# Altium PCB PCB_CONTROL.PcbDoc (part 2 of 15)
Units mil, origin at the board's own origin, x right, y up, seen from the top; angles counter-clockwise.
Board outline 7360.03 x 4773.15 mil, 2 copper layers (Top Layer, Bottom Layer); 73 components, 135 nets, 396 pads, 106 vias.
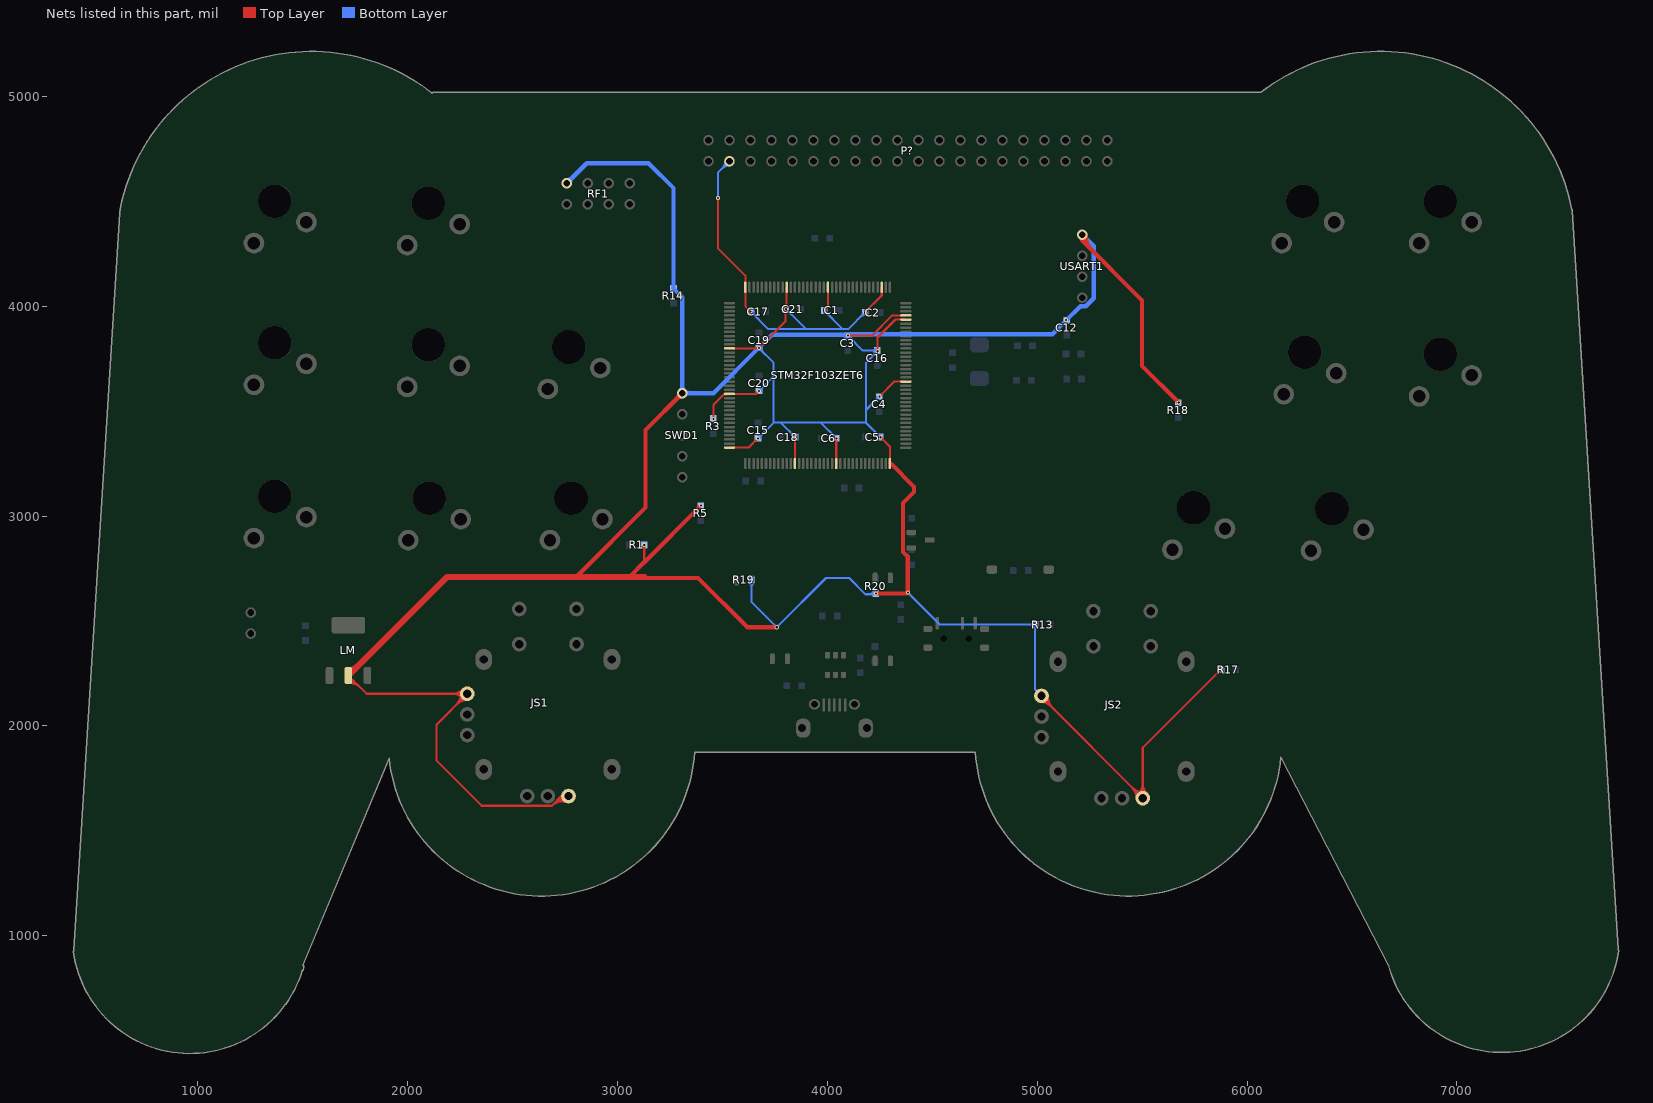
[diagram p2: the nets of this part, all layers, seen from the top]

## Via types
v1: diameter 20, hole 10, Top Layer to Bottom Layer, 104 vias
v2: diameter 30, hole 20, Top Layer to Bottom Layer, 2 vias

## Nets (pads, with @x,y where several pads share a name; then routed paths per layer and width w, separated by ;. In a path a pad name is that pad's centre, name@x,y a point inside that pad or via, vN(x,y) a via of type N, cw(c..) or ccw(c..) an arc to the next point about the centre after c; other vN are vias at no path point) (continued)
3V3: (continued)
  Bottom Layer w10: v1(3480,4515) 3480,4635 P?.3@3535,4690 ; v1(3635,3975) 3720,3890 3900,3890 ; R19.2@3639,2702 3639,2591 v1(3760,2470) 3995,2705 4105,2705 4182.54,2627.46 R20.2@4228.46,2627.46 ; v1(3670,3370) 3745,3445 ; v1(3675,3595) 3745,3665 ; C19.1@3675,3795 cw(c3675,3782.93) 3683.54,3791.46 cw(c3692.07,3800) C19.1@3680,3800 ; v1(3675,3800) 3745,3730 3745,3665 ; v1@3755,2470 ccw(c3742.93,2470) 3751.46,2478.54 ccw(c3760,2487.07) 3760,2475 ccw(c3760,2487.07) 3768.54,2478.54 ccw(c3777.07,2470) v1@3765,2470 ; v1(3805,3985) 3900,3890 ; v1(3985,3980) 4075,3890 ; C3.1@4106.03,3852.51 4170.54,3788 C16.1@4239,3788 ; v1(4240,3785) 4185,3730 4185,3505 ; v1@4385,2630 cw(c4385,2617.93) 4393.54,2626.46 cw(c4402.07,2635) v1@4390,2635 ; v1(4385,2635) 4537,2483 R13.2@4991,2483 4991,2173.57 JS2.1@5021.14,2143.43 ; R13.2@4983.22,2490.78 cw(c4964.44,2509.56) 4964.44,2483 cw(c4964.44,2456.44) 4983.22,2475.22 cw(c4964.44,2456.44) 4991,2456.44 cw(c5017.56,2456.44) R13.2@4998.78,2475.22 ; v1@3476.46,4518.54 ccw(c3467.93,4527.07) 3480,4527.07 ; v1@3476.46,4518.54 ccw(c3467.93,4527.07) 3480,4527.07 ; v1@3476.46,4518.54 ccw(c3467.93,4527.07) 3480,4527.07 ; v1@3476.46,4518.54 ccw(c3467.93,4527.07) 3480,4527.07 ; 3480,4527.07 ccw(c3492.07,4527.07) v1@3483.54,4518.54 ; 3480,4527.07 ccw(c3492.07,4527.07) v1@3483.54,4518.54 ; 3480,4527.07 ccw(c3492.07,4527.07) v1@3483.54,4518.54 ; 3480,4527.07 ccw(c3492.07,4527.07) v1@3483.54,4518.54 ; 3500.86,4655.86 cw(c3535,4621.72) P?.3@3535,4670 ; 3500.86,4655.86 ccw(c3466.72,4690) P?.3@3515,4690 ; 3500.86,4655.86 ccw(c3466.72,4690) P?.3@3515,4690 ; 3500.86,4655.86 cw(c3535,4621.72) P?.3@3535,4670 ; 3500.86,4655.86 ccw(c3466.72,4690) P?.3@3515,4690 ; 3500.86,4655.86 cw(c3535,4621.72) P?.3@3535,4670 ; 3500.86,4655.86 ccw(c3466.72,4690) P?.3@3515,4690 ; 3500.86,4655.86 cw(c3535,4621.72) P?.3@3535,4670 ; 3508.25,4664.8 cw(c3542.01,4655.76) P?.3@3535,4690 ; 3508.25,4664.8 cw(c3542.01,4655.76) P?.3@3535,4690 ; 3508.25,4664.8 cw(c3542.01,4655.76) P?.3@3535,4690 ; 3508.25,4664.8 cw(c3542.01,4655.76) P?.3@3535,4690 ; 3508.25,4664.8 cw(c3542.01,4655.76) P?.3@3535,4690 ; 3508.25,4664.8 cw(c3542.01,4655.76) P?.3@3535,4690 ; 3509.8,4663.25 ccw(c3500.76,4697.01) P?.3@3535,4690 ; 3509.8,4663.25 ccw(c3500.76,4697.01) P?.3@3535,4690 ; 3509.8,4663.25 ccw(c3500.76,4697.01) P?.3@3535,4690 ; 3509.8,4663.25 ccw(c3500.76,4697.01) P?.3@3535,4690 ; 3509.8,4663.25 ccw(c3500.76,4697.01) P?.3@3535,4690 ; 3509.8,4663.25 ccw(c3500.76,4697.01) P?.3@3535,4690 ; R19.2@3631.22,2689.22 cw(c3612.44,2670.44) 3639,2670.44 ; R19.2@3631.22,2689.22 cw(c3612.44,2670.44) 3639,2670.44 ; R19.2@3631.22,2689.22 cw(c3612.44,2670.44) 3639,2670.44 ; R19.2@3631.22,2689.22 cw(c3612.44,2670.44) 3639,2670.44 ; C17.1@3635,3970 cw(c3635,3957.93) C17.1@3643.54,3966.46 ; C17.1@3635,3970 cw(c3635,3957.93) C17.1@3643.54,3966.46 ; C17.1@3635,3970 cw(c3635,3957.93) C17.1@3643.54,3966.46 ; C17.1@3635,3970 cw(c3635,3957.93) C17.1@3643.54,3966.46 ; C17.1@3635,3970 cw(c3635,3957.93) C17.1@3643.54,3966.46 ; C17.1@3635,3970 cw(c3635,3957.93) C17.1@3643.54,3966.46 ; C17.1@3635,3970 cw(c3635,3957.93) C17.1@3643.54,3966.46 ; C17.1@3637,3963 cw(c3637,3938.86) 3654.07,3955.93 ; C17.1@3637,3963 cw(c3637,3938.86) 3654.07,3955.93 ; C17.1@3637,3963 cw(c3637,3938.86) 3654.07,3955.93 ; C17.1@3637,3963 cw(c3637,3938.86) 3654.07,3955.93 ; C17.1@3637,3963 cw(c3637,3938.86) 3654.07,3955.93 ; C17.1@3637,3963 cw(c3637,3938.86) 3654.07,3955.93 ; C17.1@3637,3963 cw(c3637,3938.86) 3654.07,3955.93 ; 3639,2670.44 cw(c3665.56,2670.44) R19.2@3646.78,2689.22 ; 3639,2670.44 cw(c3665.56,2670.44) R19.2@3646.78,2689.22 ; 3639,2670.44 cw(c3665.56,2670.44) R19.2@3646.78,2689.22 ; 3639,2670.44 cw(c3665.56,2670.44) R19.2@3646.78,2689.22 ; 3639,2675.44 ccw(c3612.44,2675.44) 3631.22,2694.22 cw(c3612.44,2675.44) 3639,2675.44 ; 3639,2675.44 cw(c3665.56,2675.44) 3646.78,2694.22 ccw(c3665.56,2675.44) 3639,2675.44 ; C17.1@3640,3975 ccw(c3652.07,3975) C17.1@3643.54,3966.46 ; C17.1@3640,3975 ccw(c3652.07,3975) C17.1@3643.54,3966.46 ; C17.1@3640,3975 ccw(c3652.07,3975) C17.1@3643.54,3966.46 ; C17.1@3640,3975 ccw(c3652.07,3975) C17.1@3643.54,3966.46 ; C17.1@3640,3975 ccw(c3652.07,3975) C17.1@3643.54,3966.46 ; C17.1@3640,3975 ccw(c3652.07,3975) C17.1@3643.54,3966.46 ; C17.1@3640,3975 ccw(c3652.07,3975) C17.1@3643.54,3966.46 ; C17.1@3648,3974 ccw(c3676.97,3974) 3656.49,3953.51 ; C17.1@3648,3974 ccw(c3676.97,3974) 3656.49,3953.51 ; C17.1@3648,3974 ccw(c3676.97,3974) 3656.49,3953.51 ; C17.1@3648,3974 ccw(c3676.97,3974) 3656.49,3953.51 ; C17.1@3648,3974 ccw(c3676.97,3974) 3656.49,3953.51 ; C17.1@3648,3974 ccw(c3676.97,3974) 3656.49,3953.51 ; C17.1@3648,3974 ccw(c3676.97,3974) 3656.49,3953.51 ; C15.1@3670,3375 ccw(c3670,3387.07) C15.1@3678.54,3378.54 ; C15.1@3670,3375 ccw(c3670,3387.07) C15.1@3678.54,3378.54 ; C15.1@3670,3375 ccw(c3670,3387.07) C15.1@3678.54,3378.54 ; C15.1@3670,3375 ccw(c3670,3387.07) C15.1@3678.54,3378.54 ; C19.1@3670.42,3798 ccw(c3683.36,3803.65) C19.1@3679.71,3790.01 ; C19.1@3670.42,3798 ccw(c3683.36,3803.65) C19.1@3679.71,3790.01 ; C19.1@3670.42,3798 ccw(c3683.36,3803.65) C19.1@3679.71,3790.01 ; C15.1@3671,3383 ccw(c3671,3411.97) 3691.49,3391.49 ; C15.1@3671,3383 ccw(c3671,3411.97) 3691.49,3391.49 ; C15.1@3671,3383 ccw(c3671,3411.97) 3691.49,3391.49 ; C15.1@3671,3383 ccw(c3671,3411.97) 3691.49,3391.49 ; C15.1@3675,3370 cw(c3687.07,3370) C15.1@3678.54,3378.54 ; C15.1@3675,3370 cw(c3687.07,3370) C15.1@3678.54,3378.54 ; C15.1@3675,3370 cw(c3687.07,3370) C15.1@3678.54,3378.54 ; C15.1@3675,3370 cw(c3687.07,3370) C15.1@3678.54,3378.54 ; C20.1@3675,3600 ccw(c3675,3612.07) C20.1@3683.54,3603.54 ; C20.1@3675,3600 ccw(c3675,3612.07) C20.1@3683.54,3603.54 ; C20.1@3675,3600 ccw(c3675,3612.07) C20.1@3683.54,3603.54 ; C20.1@3675,3600 ccw(c3675,3612.07) C20.1@3683.54,3603.54 ; C19.1@3675.71,3801.04 cw(c3668.98,3778.56) 3691.65,3784.63 ; C19.1@3675.71,3801.04 cw(c3668.98,3778.56) 3691.65,3784.63 ; C19.1@3675.71,3801.04 cw(c3668.98,3778.56) 3691.65,3784.63 ; C20.1@3676,3608 ccw(c3676,3636.97) 3696.49,3616.49 ; C20.1@3676,3608 ccw(c3676,3636.97) 3696.49,3616.49 ; C20.1@3676,3608 ccw(c3676,3636.97) 3696.49,3616.49 ; C20.1@3676,3608 ccw(c3676,3636.97) 3696.49,3616.49 ; C19.1@3676,3791 cw(c3676,3771.69) 3689.66,3785.34 ; C19.1@3676,3791 cw(c3676,3771.69) 3689.66,3785.34 ; C19.1@3676,3791 cw(c3676,3771.69) 3689.66,3785.34 ; C19.1@3677.13,3795.47 cw(c3680.88,3787.48) C19.1@3685.51,3795 ; C19.1@3677.13,3795.47 cw(c3680.88,3787.48) C19.1@3685.51,3795 ; C19.1@3677.13,3795.47 cw(c3680.88,3787.48) C19.1@3685.51,3795 ; C20.1@3680,3595 cw(c3692.07,3595) C20.1@3683.54,3603.54 ; C20.1@3680,3595 cw(c3692.07,3595) C20.1@3683.54,3603.54 ; C20.1@3680,3595 cw(c3692.07,3595) C20.1@3683.54,3603.54 ; C20.1@3680,3595 cw(c3692.07,3595) C20.1@3683.54,3603.54 ; C15.1@3682,3372 cw(c3706.14,3372) 3689.07,3389.07 ; C15.1@3682,3372 cw(c3706.14,3372) 3689.07,3389.07 ; C15.1@3682,3372 cw(c3706.14,3372) 3689.07,3389.07 ; C15.1@3682,3372 cw(c3706.14,3372) 3689.07,3389.07 ; C20.1@3687,3597 cw(c3711.14,3597) 3694.07,3614.07 ; C20.1@3687,3597 cw(c3711.14,3597) 3694.07,3614.07 ; C20.1@3687,3597 cw(c3711.14,3597) 3694.07,3614.07 ; C20.1@3687,3597 cw(c3711.14,3597) 3694.07,3614.07 ; C19.1@3687,3802 ccw(c3720.8,3802) 3696.9,3778.1 ; C19.1@3687,3802 ccw(c3720.8,3802) 3696.9,3778.1 ; C19.1@3687,3802 ccw(c3720.8,3802) 3696.9,3778.1 ; 3745,3445 3745,3665 ; 3745,3445 3780,3445 ; 3780,3445 3970,3445 ; 3780,3445 v1(3850,3375) ; C21.1@3802,3973 cw(c3802,3936.79) 3827.61,3962.39 ; C21.1@3802,3973 cw(c3802,3936.79) 3827.61,3962.39 ; C21.1@3802,3973 cw(c3802,3936.79) 3827.61,3962.39 ; C21.1@3802,3973 cw(c3802,3936.79) 3827.61,3962.39 ; C21.1@3802,3973 cw(c3802,3936.79) 3827.61,3962.39 ; C21.1@3802,3973 cw(c3802,3936.79) 3827.61,3962.39 ; C21.1@3802,3973 cw(c3802,3936.79) 3827.61,3962.39 ; C21.1@3802.95,3984.31 ccw(c3826.41,3992.02) 3820.02,3968.17 ; C21.1@3802.95,3984.31 ccw(c3826.41,3992.02) 3820.02,3968.17 ; C21.1@3802.95,3984.31 ccw(c3826.41,3992.02) 3820.02,3968.17 ; C21.1@3802.95,3984.31 ccw(c3826.41,3992.02) 3820.02,3968.17 ; C21.1@3802.95,3984.31 ccw(c3826.41,3992.02) 3820.02,3968.17 ; C21.1@3802.95,3984.31 ccw(c3826.41,3992.02) 3820.02,3968.17 ; C21.1@3802.95,3984.31 ccw(c3826.41,3992.02) 3820.02,3968.17 ; C21.1@3802.95,3984.31 ccw(c3826.41,3992.02) 3820.02,3968.17 ; C21.1@3802.95,3984.31 ccw(c3826.41,3992.02) 3820.02,3968.17 ; C21.1@3802.95,3984.31 ccw(c3826.41,3992.02) 3820.02,3968.17 ; C21.1@3802.95,3984.31 ccw(c3826.41,3992.02) 3820.02,3968.17 ; C21.1@3802.95,3984.31 ccw(c3826.41,3992.02) 3820.02,3968.17 ; C21.1@3802.95,3984.31 ccw(c3826.41,3992.02) 3820.02,3968.17 ; C21.1@3802.95,3984.31 ccw(c3826.41,3992.02) 3820.02,3968.17 ; C21.1@3802.95,3984.31 ccw(c3826.41,3992.02) 3820.02,3968.17 ; C21.1@3802.95,3984.31 ccw(c3826.41,3992.02) 3820.02,3968.17 ; C21.1@3802.95,3984.31 ccw(c3826.41,3992.02) 3820.02,3968.17 ; C21.1@3802.95,3984.31 ccw(c3826.41,3992.02) 3820.02,3968.17 ; C21.1@3802.95,3984.31 ccw(c3826.41,3992.02) 3820.02,3968.17 ; C21.1@3802.95,3984.31 ccw(c3826.41,3992.02) 3820.02,3968.17 ; C21.1@3802.95,3984.31 ccw(c3826.41,3992.02) 3820.02,3968.17 ; C21.1@3805,3980 cw(c3805,3967.93) C21.1@3813.54,3976.46 ; C21.1@3805,3980 cw(c3805,3967.93) C21.1@3813.54,3976.46 ; C21.1@3805,3980 cw(c3805,3967.93) C21.1@3813.54,3976.46 ; C21.1@3805,3980 cw(c3805,3967.93) C21.1@3813.54,3976.46 ; C21.1@3805,3980 cw(c3805,3967.93) C21.1@3813.54,3976.46 ; C21.1@3805,3980 cw(c3805,3967.93) C21.1@3813.54,3976.46 ; C21.1@3805,3980 cw(c3805,3967.93) C21.1@3813.54,3976.46 ; C21.1@3809.29,3982.43 ccw(c3815.79,3978.53) C21.1@3809.45,3974.38 ; C21.1@3809.29,3982.43 ccw(c3815.79,3978.53) C21.1@3809.45,3974.38 ; C21.1@3809.29,3982.43 ccw(c3815.79,3978.53) C21.1@3809.45,3974.38 ; C21.1@3809.29,3982.43 ccw(c3815.79,3978.53) C21.1@3809.45,3974.38 ; C21.1@3809.29,3982.43 ccw(c3815.79,3978.53) C21.1@3809.45,3974.38 ; C21.1@3809.29,3982.43 ccw(c3815.79,3978.53) C21.1@3809.45,3974.38 ; C21.1@3809.29,3982.43 ccw(c3815.79,3978.53) C21.1@3809.45,3974.38 ; C21.1@3809.29,3982.43 ccw(c3815.79,3978.53) C21.1@3809.45,3974.38 ; C21.1@3809.29,3982.43 ccw(c3815.79,3978.53) C21.1@3809.45,3974.38 ; C21.1@3809.29,3982.43 ccw(c3815.79,3978.53) C21.1@3809.45,3974.38 ; C21.1@3809.29,3982.43 ccw(c3815.79,3978.53) C21.1@3809.45,3974.38 ; C21.1@3809.29,3982.43 ccw(c3815.79,3978.53) C21.1@3809.45,3974.38 ; C21.1@3809.29,3982.43 ccw(c3815.79,3978.53) C21.1@3809.45,3974.38 ; C21.1@3809.29,3982.43 ccw(c3815.79,3978.53) C21.1@3809.45,3974.38 ; C21.1@3809.29,3982.43 ccw(c3815.79,3978.53) C21.1@3809.45,3974.38 ; C21.1@3809.29,3982.43 ccw(c3815.79,3978.53) C21.1@3809.45,3974.38 ; C21.1@3809.29,3982.43 ccw(c3815.79,3978.53) C21.1@3809.45,3974.38 ; C21.1@3809.29,3982.43 ccw(c3815.79,3978.53) C21.1@3809.45,3974.38 ; C21.1@3809.29,3982.43 ccw(c3815.79,3978.53) C21.1@3809.45,3974.38 ; C21.1@3809.29,3982.43 ccw(c3815.79,3978.53) C21.1@3809.45,3974.38 ; C21.1@3809.29,3982.43 ccw(c3815.79,3978.53) C21.1@3809.45,3974.38 ; C21.1@3809.29,3982.43 ccw(c3815.79,3978.53) C21.1@3809.45,3974.38 ; C21.1@3809.29,3982.43 ccw(c3815.79,3978.53) C21.1@3809.45,3974.38 ; C21.1@3809.29,3982.43 ccw(c3815.79,3978.53) C21.1@3809.45,3974.38 ; C21.1@3809.29,3982.43 ccw(c3815.79,3978.53) C21.1@3809.45,3974.38 ; C21.1@3809.29,3982.43 ccw(c3815.79,3978.53) C21.1@3809.45,3974.38 ; C21.1@3809.29,3982.43 ccw(c3815.79,3978.53) C21.1@3809.45,3974.38 ; C21.1@3809.29,3982.43 ccw(c3815.79,3978.53) C21.1@3809.45,3974.38 ; C21.1@3809.29,3982.43 ccw(c3815.79,3978.53) C21.1@3809.45,3974.38 ; C21.1@3809.29,3982.43 ccw(c3815.79,3978.53) C21.1@3809.45,3974.38 ; C21.1@3809.29,3982.43 ccw(c3815.79,3978.53) C21.1@3809.45,3974.38 ; C21.1@3809.29,3982.43 ccw(c3815.79,3978.53) C21.1@3809.45,3974.38 ; C21.1@3809.29,3982.43 ccw(c3815.79,3978.53) C21.1@3809.45,3974.38 ; C21.1@3809.29,3982.43 ccw(c3815.79,3978.53) C21.1@3809.45,3974.38 ; C21.1@3809.29,3982.43 ccw(c3815.79,3978.53) C21.1@3809.45,3974.38 ; C21.1@3809.29,3982.43 ccw(c3815.79,3978.53) C21.1@3809.45,3974.38 ; C21.1@3809.29,3982.43 ccw(c3815.79,3978.53) C21.1@3809.45,3974.38 ; C21.1@3809.29,3982.43 ccw(c3815.79,3978.53) C21.1@3809.45,3974.38 ; C21.1@3809.29,3982.43 ccw(c3815.79,3978.53) C21.1@3809.45,3974.38 ; C21.1@3809.29,3982.43 ccw(c3815.79,3978.53) C21.1@3809.45,3974.38 ; C21.1@3809.29,3982.43 ccw(c3815.79,3978.53) C21.1@3809.45,3974.38 ; C21.1@3809.29,3982.43 ccw(c3815.79,3978.53) C21.1@3809.45,3974.38 ; C21.1@3809.29,3982.43 ccw(c3815.79,3978.53) C21.1@3809.45,3974.38 ; C21.1@3809.29,3982.43 ccw(c3815.79,3978.53) C21.1@3809.45,3974.38 ; C21.1@3809.29,3982.43 ccw(c3815.79,3978.53) C21.1@3809.45,3974.38 ; C21.1@3809.29,3982.43 ccw(c3815.79,3978.53) C21.1@3809.45,3974.38 ; C21.1@3809.29,3982.43 ccw(c3815.79,3978.53) C21.1@3809.45,3974.38 ; C21.1@3809.29,3982.43 ccw(c3815.79,3978.53) C21.1@3809.45,3974.38 ; C21.1@3809.29,3982.43 ccw(c3815.79,3978.53) C21.1@3809.45,3974.38 ; C21.1@3809.29,3982.43 ccw(c3815.79,3978.53) C21.1@3809.45,3974.38 ; C21.1@3809.29,3982.43 ccw(c3815.79,3978.53) C21.1@3809.45,3974.38 ; C21.1@3809.29,3982.43 ccw(c3815.79,3978.53) C21.1@3809.45,3974.38 ; C21.1@3809.29,3982.43 ccw(c3815.79,3978.53) C21.1@3809.45,3974.38 ; C21.1@3809.29,3982.43 ccw(c3815.79,3978.53) C21.1@3809.45,3974.38 ; C21.1@3809.29,3982.43 ccw(c3815.79,3978.53) C21.1@3809.45,3974.38 ; C21.1@3809.29,3982.43 ccw(c3815.79,3978.53) C21.1@3809.45,3974.38 ; C21.1@3810,3985 ccw(c3822.07,3985) C21.1@3813.54,3976.46 ; C21.1@3810,3985 ccw(c3822.07,3985) C21.1@3813.54,3976.46 ; C21.1@3810,3985 ccw(c3822.07,3985) C21.1@3813.54,3976.46 ; C21.1@3810,3985 ccw(c3822.07,3985) C21.1@3813.54,3976.46 ; C21.1@3810,3985 ccw(c3822.07,3985) C21.1@3813.54,3976.46 ; C21.1@3810,3985 ccw(c3822.07,3985) C21.1@3813.54,3976.46 ; C21.1@3810,3985 ccw(c3822.07,3985) C21.1@3813.54,3976.46 ; C21.1@3813,3984 ccw(c3829.9,3984) C21.1@3817.95,3972.05 ; C21.1@3813,3984 ccw(c3829.9,3984) C21.1@3817.95,3972.05 ; C21.1@3813,3984 ccw(c3829.9,3984) C21.1@3817.95,3972.05 ; C21.1@3813,3984 ccw(c3829.9,3984) C21.1@3817.95,3972.05 ; C21.1@3813,3984 ccw(c3829.9,3984) C21.1@3817.95,3972.05 ; C21.1@3813,3984 ccw(c3829.9,3984) C21.1@3817.95,3972.05 ; C21.1@3813,3984 ccw(c3829.9,3984) C21.1@3817.95,3972.05 ; 3818.79,3406.21 v1(3850,3375) ; 3818.79,3406.21 v1(3850,3375) ; 3818.79,3406.21 v1(3850,3375) ; 3828.51,3396.49 cw(c3808.03,3376) C18.1@3837,3376 ; 3828.51,3396.49 cw(c3808.03,3376) C18.1@3837,3376 ; 3828.51,3396.49 cw(c3808.03,3376) C18.1@3837,3376 ; 3828.51,3396.49 cw(c3808.03,3376) C18.1@3837,3376 ; 3828.51,3396.49 cw(c3808.03,3376) C18.1@3837,3376 ; 3828.51,3396.49 cw(c3808.03,3376) C18.1@3837,3376 ; 3828.51,3396.49 cw(c3808.03,3376) C18.1@3837,3376 ; 3828.51,3396.49 cw(c3808.03,3376) C18.1@3837,3376 ; 3828.51,3396.49 cw(c3808.03,3376) C18.1@3837,3376 ; 3828.51,3396.49 cw(c3808.03,3376) C18.1@3837,3376 ; 3828.51,3396.49 cw(c3808.03,3376) C18.1@3837,3376 ; 3828.51,3396.49 cw(c3808.03,3376) C18.1@3837,3376 ; 3828.51,3396.49 cw(c3808.03,3376) C18.1@3837,3376 ; 3828.51,3396.49 cw(c3808.03,3376) C18.1@3837,3376 ; 3828.51,3396.49 cw(c3808.03,3376) C18.1@3837,3376 ; 3828.51,3396.49 cw(c3808.03,3376) C18.1@3837,3376 ; 3828.51,3396.49 cw(c3808.03,3376) C18.1@3837,3376 ; 3828.51,3396.49 cw(c3808.03,3376) C18.1@3837,3376 ; 3828.51,3396.49 cw(c3808.03,3376) C18.1@3837,3376 ; 3828.51,3396.49 cw(c3808.03,3376) C18.1@3837,3376 ; 3828.51,3396.49 cw(c3808.03,3376) C18.1@3837,3376 ; 3828.51,3396.49 cw(c3808.03,3376) C18.1@3837,3376 ; 3828.51,3396.49 cw(c3808.03,3376) C18.1@3837,3376 ; 3828.51,3396.49 cw(c3808.03,3376) C18.1@3837,3376 ; 3828.51,3396.49 cw(c3808.03,3376) C18.1@3837,3376 ; 3828.51,3396.49 cw(c3808.03,3376) C18.1@3837,3376 ; 3828.51,3396.49 cw(c3808.03,3376) C18.1@3837,3376 ; 3828.51,3396.49 cw(c3808.03,3376) C18.1@3837,3376 ; 3828.51,3396.49 cw(c3808.03,3376) C18.1@3837,3376 ; 3828.51,3396.49 cw(c3808.03,3376) C18.1@3837,3376 ; 3828.51,3396.49 cw(c3808.03,3376) C18.1@3837,3376 ; 3828.51,3396.49 cw(c3808.03,3376) C18.1@3837,3376 ; 3830.93,3394.07 ccw(c3848,3411.14) C18.1@3848,3387 ; 3830.93,3394.07 ccw(c3848,3411.14) C18.1@3848,3387 ; 3830.93,3394.07 ccw(c3848,3411.14) C18.1@3848,3387 ; 3830.93,3394.07 ccw(c3848,3411.14) C18.1@3848,3387 ; 3830.93,3394.07 ccw(c3848,3411.14) C18.1@3848,3387 ; 3830.93,3394.07 ccw(c3848,3411.14) C18.1@3848,3387 ; 3830.93,3394.07 ccw(c3848,3411.14) C18.1@3848,3387 ; 3830.93,3394.07 ccw(c3848,3411.14) C18.1@3848,3387 ; 3830.93,3394.07 ccw(c3848,3411.14) C18.1@3848,3387 ; 3830.93,3394.07 ccw(c3848,3411.14) C18.1@3848,3387 ; 3830.93,3394.07 ccw(c3848,3411.14) C18.1@3848,3387 ; 3830.93,3394.07 ccw(c3848,3411.14) C18.1@3848,3387 ; 3830.93,3394.07 ccw(c3848,3411.14) C18.1@3848,3387 ; 3830.93,3394.07 ccw(c3848,3411.14) C18.1@3848,3387 ; 3830.93,3394.07 ccw(c3848,3411.14) C18.1@3848,3387 ; 3830.93,3394.07 ccw(c3848,3411.14) C18.1@3848,3387 ; 3830.93,3394.07 ccw(c3848,3411.14) C18.1@3848,3387 ; 3830.93,3394.07 ccw(c3848,3411.14) C18.1@3848,3387 ; 3830.93,3394.07 ccw(c3848,3411.14) C18.1@3848,3387 ; 3830.93,3394.07 ccw(c3848,3411.14) C18.1@3848,3387 ; 3830.93,3394.07 ccw(c3848,3411.14) C18.1@3848,3387 ; 3830.93,3394.07 ccw(c3848,3411.14) C18.1@3848,3387 ; 3830.93,3394.07 ccw(c3848,3411.14) C18.1@3848,3387 ; 3830.93,3394.07 ccw(c3848,3411.14) C18.1@3848,3387 ; 3830.93,3394.07 ccw(c3848,3411.14) C18.1@3848,3387 ; 3830.93,3394.07 ccw(c3848,3411.14) C18.1@3848,3387 ; 3830.93,3394.07 ccw(c3848,3411.14) C18.1@3848,3387 ; 3830.93,3394.07 ccw(c3848,3411.14) C18.1@3848,3387 ; 3830.93,3394.07 ccw(c3848,3411.14) C18.1@3848,3387 ; 3830.93,3394.07 ccw(c3848,3411.14) C18.1@3848,3387 ; 3830.93,3394.07 ccw(c3848,3411.14) C18.1@3848,3387 ; 3830.93,3394.07 ccw(c3848,3411.14) C18.1@3848,3387 ; C18.1@3841.46,3383.54 cw(c3832.93,3375) C18.1@3845,3375 ; C18.1@3841.46,3383.54 ccw(c3850,3392.07) C18.1@3850,3380 ; C18.1@3841.46,3383.54 cw(c3832.93,3375) C18.1@3845,3375 ; C18.1@3841.46,3383.54 ccw(c3850,3392.07) C18.1@3850,3380 ; C18.1@3841.46,3383.54 cw(c3832.93,3375) C18.1@3845,3375 ; C18.1@3841.46,3383.54 ccw(c3850,3392.07) C18.1@3850,3380 ; C18.1@3841.46,3383.54 cw(c3832.93,3375) C18.1@3845,3375 ; C18.1@3841.46,3383.54 ccw(c3850,3392.07) C18.1@3850,3380 ; C18.1@3841.46,3383.54 ccw(c3850,3392.07) C18.1@3850,3380 ; C18.1@3841.46,3383.54 cw(c3832.93,3375) C18.1@3845,3375 ; C18.1@3841.46,3383.54 ccw(c3850,3392.07) C18.1@3850,3380 ; C18.1@3841.46,3383.54 cw(c3832.93,3375) C18.1@3845,3375 ; C18.1@3841.46,3383.54 ccw(c3850,3392.07) C18.1@3850,3380 ; C18.1@3841.46,3383.54 cw(c3832.93,3375) C18.1@3845,3375 ; C18.1@3841.46,3383.54 ccw(c3850,3392.07) C18.1@3850,3380 ; C18.1@3841.46,3383.54 cw(c3832.93,3375) C18.1@3845,3375 ; C18.1@3841.46,3383.54 ccw(c3850,3392.07) C18.1@3850,3380 ; C18.1@3841.46,3383.54 cw(c3832.93,3375) C18.1@3845,3375 ; C18.1@3841.46,3383.54 ccw(c3850,3392.07) C18.1@3850,3380 ; C18.1@3841.46,3383.54 cw(c3832.93,3375) C18.1@3845,3375 ; C18.1@3841.46,3383.54 ccw(c3850,3392.07) C18.1@3850,3380 ; C18.1@3841.46,3383.54 cw(c3832.93,3375) C18.1@3845,3375 ; C18.1@3841.46,3383.54 ccw(c3850,3392.07) C18.1@3850,3380 ; C18.1@3841.46,3383.54 cw(c3832.93,3375) C18.1@3845,3375 ; C18.1@3841.46,3383.54 ccw(c3850,3392.07) C18.1@3850,3380 ; C18.1@3841.46,3383.54 cw(c3832.93,3375) C18.1@3845,3375 ; C18.1@3841.46,3383.54 ccw(c3850,3392.07) C18.1@3850,3380 ; C18.1@3841.46,3383.54 cw(c3832.93,3375) C18.1@3845,3375 ; C18.1@3841.46,3383.54 ccw(c3850,3392.07) C18.1@3850,3380 ; C18.1@3841.46,3383.54 cw(c3832.93,3375) C18.1@3845,3375 ; C18.1@3841.46,3383.54 ccw(c3850,3392.07) C18.1@3850,3380 ; C18.1@3841.46,3383.54 cw(c3832.93,3375) C18.1@3845,3375 ; C18.1@3841.46,3383.54 ccw(c3850,3392.07) C18.1@3850,3380 ; C18.1@3841.46,3383.54 cw(c3832.93,3375) C18.1@3845,3375 ; C18.1@3841.46,3383.54 ccw(c3850,3392.07) C18.1@3850,3380 ; C18.1@3841.46,3383.54 cw(c3832.93,3375) C18.1@3845,3375 ; C18.1@3841.46,3383.54 ccw(c3850,3392.07) C18.1@3850,3380 ; C18.1@3841.46,3383.54 cw(c3832.93,3375) C18.1@3845,3375 ; C18.1@3841.46,3383.54 ccw(c3850,3392.07) C18.1@3850,3380 ; C18.1@3841.46,3383.54 cw(c3832.93,3375) C18.1@3845,3375 ; C18.1@3841.46,3383.54 ccw(c3850,3392.07) C18.1@3850,3380 ; C18.1@3841.46,3383.54 cw(c3832.93,3375) C18.1@3845,3375 ; C18.1@3841.46,3383.54 ccw(c3850,3392.07) C18.1@3850,3380 ; C18.1@3841.46,3383.54 cw(c3832.93,3375) C18.1@3845,3375 ; C18.1@3841.46,3383.54 ccw(c3850,3392.07) C18.1@3850,3380 ; C18.1@3841.46,3383.54 cw(c3832.93,3375) C18.1@3845,3375 ; C18.1@3841.46,3383.54 ccw(c3850,3392.07) C18.1@3850,3380 ; C18.1@3841.46,3383.54 cw(c3832.93,3375) C18.1@3845,3375 ; C18.1@3841.46,3383.54 ccw(c3850,3392.07) C18.1@3850,3380 ; C18.1@3841.46,3383.54 cw(c3832.93,3375) C18.1@3845,3375 ; C18.1@3841.46,3383.54 ccw(c3850,3392.07) C18.1@3850,3380 ; C18.1@3841.46,3383.54 cw(c3832.93,3375) C18.1@3845,3375 ; C18.1@3841.46,3383.54 ccw(c3850,3392.07) C18.1@3850,3380 ; C18.1@3841.46,3383.54 cw(c3832.93,3375) C18.1@3845,3375 ; C18.1@3841.46,3383.54 ccw(c3850,3392.07) C18.1@3850,3380 ; C18.1@3841.46,3383.54 cw(c3832.93,3375) C18.1@3845,3375 ; C18.1@3841.46,3383.54 ccw(c3850,3392.07) C18.1@3850,3380 ; C18.1@3841.46,3383.54 cw(c3832.93,3375) C18.1@3845,3375 ; C18.1@3841.46,3383.54 ccw(c3850,3392.07) C18.1@3850,3380 ; C18.1@3841.46,3383.54 cw(c3832.93,3375) C18.1@3845,3375 ; C18.1@3841.46,3383.54 ccw(c3850,3392.07) C18.1@3850,3380 ; C18.1@3841.46,3383.54 cw(c3832.93,3375) C18.1@3845,3375 ; C18.1@3841.46,3383.54 ccw(c3850,3392.07) C18.1@3850,3380 ; C18.1@3841.46,3383.54 cw(c3832.93,3375) C18.1@3845,3375 ; C18.1@3841.46,3383.54 ccw(c3850,3392.07) C18.1@3850,3380 ; C18.1@3841.46,3383.54 cw(c3832.93,3375) C18.1@3845,3375 ; C18.1@3841.46,3383.54 ccw(c3850,3392.07) C18.1@3850,3380 ; C18.1@3841.46,3383.54 cw(c3832.93,3375) C18.1@3845,3375 ; C18.1@3841.46,3383.54 ccw(c3850,3392.07) C18.1@3850,3380 ; C18.1@3841.46,3383.54 cw(c3832.93,3375) C18.1@3845,3375 ; C18.1@3841.46,3383.54 ccw(c3850,3392.07) C18.1@3850,3380 ; C18.1@3841.46,3383.54 cw(c3832.93,3375) C18.1@3845,3375 ; 3900,3890 4075,3890 ; 3970,3445 4185,3445 ; 3970,3445 v1(4045,3370) ; C1.1@3985,3975 cw(c3985,3962.93) C1.1@3993.54,3971.46 ; C1.1@3985,3975 cw(c3985,3962.93) C1.1@3993.54,3971.46 ; C1.1@3985,3975 cw(c3985,3962.93) C1.1@3993.54,3971.46 ; C1.1@3985,3975 cw(c3985,3962.93) C1.1@3993.54,3971.46 ; C1.1@3985,3975 cw(c3985,3962.93) C1.1@3993.54,3971.46 ; C1.1@3985,3975 cw(c3985,3962.93) C1.1@3993.54,3971.46 ; C1.1@3985,3975 cw(c3985,3962.93) C1.1@3993.54,3971.46 ; C1.1@3987,3968 cw(c3987,3943.86) 4004.07,3960.93 ; C1.1@3987,3968 cw(c3987,3943.86) 4004.07,3960.93 ; C1.1@3987,3968 cw(c3987,3943.86) 4004.07,3960.93 ; C1.1@3987,3968 cw(c3987,3943.86) 4004.07,3960.93 ; C1.1@3987,3968 cw(c3987,3943.86) 4004.07,3960.93 ; C1.1@3987,3968 cw(c3987,3943.86) 4004.07,3960.93 ; C1.1@3987,3968 cw(c3987,3943.86) 4004.07,3960.93 ; C1.1@3990,3980 ccw(c4002.07,3980) C1.1@3993.54,3971.46 ; C1.1@3990,3980 ccw(c4002.07,3980) C1.1@3993.54,3971.46 ; C1.1@3990,3980 ccw(c4002.07,3980) C1.1@3993.54,3971.46 ; C1.1@3990,3980 ccw(c4002.07,3980) C1.1@3993.54,3971.46 ; C1.1@3990,3980 ccw(c4002.07,3980) C1.1@3993.54,3971.46 ; C1.1@3990,3980 ccw(c4002.07,3980) C1.1@3993.54,3971.46 ; C1.1@3990,3980 ccw(c4002.07,3980) C1.1@3993.54,3971.46 ; C1.1@3998,3979 ccw(c4026.97,3979) 4006.49,3958.51 ; C1.1@3998,3979 ccw(c4026.97,3979) 4006.49,3958.51 ; C1.1@3998,3979 ccw(c4026.97,3979) 4006.49,3958.51 ; C1.1@3998,3979 ccw(c4026.97,3979) 4006.49,3958.51 ; C1.1@3998,3979 ccw(c4026.97,3979) 4006.49,3958.51 ; C1.1@3998,3979 ccw(c4026.97,3979) 4006.49,3958.51 ; C1.1@3998,3979 ccw(c4026.97,3979) 4006.49,3958.51 ; 4013.79,3401.21 v1(4045,3370) ; 4013.79,3401.21 v1(4045,3370) ; 4013.79,3401.21 v1(4045,3370) ; 4023.51,3391.49 cw(c4003.03,3371) C6.1@4032,3371 ; 4023.51,3391.49 cw(c4003.03,3371) C6.1@4032,3371 ; 4023.51,3391.49 cw(c4003.03,3371) C6.1@4032,3371 ; 4023.51,3391.49 cw(c4003.03,3371) C6.1@4032,3371 ; 4023.51,3391.49 cw(c4003.03,3371) C6.1@4032,3371 ; 4023.51,3391.49 cw(c4003.03,3371) C6.1@4032,3371 ; 4023.51,3391.49 cw(c4003.03,3371) C6.1@4032,3371 ; 4023.51,3391.49 cw(c4003.03,3371) C6.1@4032,3371 ; 4023.51,3391.49 cw(c4003.03,3371) C6.1@4032,3371 ; 4023.51,3391.49 cw(c4003.03,3371) C6.1@4032,3371 ; 4023.51,3391.49 cw(c4003.03,3371) C6.1@4032,3371 ; 4023.51,3391.49 cw(c4003.03,3371) C6.1@4032,3371 ; 4023.51,3391.49 cw(c4003.03,3371) C6.1@4032,3371 ; 4023.51,3391.49 cw(c4003.03,3371) C6.1@4032,3371 ; 4023.51,3391.49 cw(c4003.03,3371) C6.1@4032,3371 ; 4023.51,3391.49 cw(c4003.03,3371) C6.1@4032,3371 ; 4023.51,3391.49 cw(c4003.03,3371) C6.1@4032,3371 ; 4023.51,3391.49 cw(c4003.03,3371) C6.1@4032,3371 ; 4023.51,3391.49 cw(c4003.03,3371) C6.1@4032,3371 ; 4023.51,3391.49 cw(c4003.03,3371) C6.1@4032,3371 ; 4023.51,3391.49 cw(c4003.03,3371) C6.1@4032,3371 ; 4023.51,3391.49 cw(c4003.03,3371) C6.1@4032,3371 ; 4023.51,3391.49 cw(c4003.03,3371) C6.1@4032,3371 ; 4023.51,3391.49 cw(c4003.03,3371) C6.1@4032,3371 ; 4023.51,3391.49 cw(c4003.03,3371) C6.1@4032,3371 ; 4023.51,3391.49 cw(c4003.03,3371) C6.1@4032,3371 ; 4023.51,3391.49 cw(c4003.03,3371) C6.1@4032,3371 ; 4023.51,3391.49 cw(c4003.03,3371) C6.1@4032,3371 ; 4023.51,3391.49 cw(c4003.03,3371) C6.1@4032,3371 ; 4023.51,3391.49 cw(c4003.03,3371) C6.1@4032,3371 ; 4023.51,3391.49 cw(c4003.03,3371) C6.1@4032,3371 ; 4023.51,3391.49 cw(c4003.03,3371) C6.1@4032,3371 ; 4025.93,3389.07 ccw(c4043,3406.14) C6.1@4043,3382 ; 4025.93,3389.07 ccw(c4043,3406.14) C6.1@4043,3382 ; 4025.93,3389.07 ccw(c4043,3406.14) C6.1@4043,3382 ; 4025.93,3389.07 ccw(c4043,3406.14) C6.1@4043,3382 ; 4025.93,3389.07 ccw(c4043,3406.14) C6.1@4043,3382 ; 4025.93,3389.07 ccw(c4043,3406.14) C6.1@4043,3382 ; 4025.93,3389.07 ccw(c4043,3406.14) C6.1@4043,3382 ; 4025.93,3389.07 ccw(c4043,3406.14) C6.1@4043,3382 ; 4025.93,3389.07 ccw(c4043,3406.14) C6.1@4043,3382 ; 4025.93,3389.07 ccw(c4043,3406.14) C6.1@4043,3382 ; 4025.93,3389.07 ccw(c4043,3406.14) C6.1@4043,3382 ; 4025.93,3389.07 ccw(c4043,3406.14) C6.1@4043,3382 ; 4025.93,3389.07 ccw(c4043,3406.14) C6.1@4043,3382 ; 4025.93,3389.07 ccw(c4043,3406.14) C6.1@4043,3382 ; 4025.93,3389.07 ccw(c4043,3406.14) C6.1@4043,3382 ; 4025.93,3389.07 ccw(c4043,3406.14) C6.1@4043,3382 ; 4025.93,3389.07 ccw(c4043,3406.14) C6.1@4043,3382 ; 4025.93,3389.07 ccw(c4043,3406.14) C6.1@4043,3382 ; 4025.93,3389.07 ccw(c4043,3406.14) C6.1@4043,3382 ; 4025.93,3389.07 ccw(c4043,3406.14) C6.1@4043,3382 ; 4025.93,3389.07 ccw(c4043,3406.14) C6.1@4043,3382 ; 4025.93,3389.07 ccw(c4043,3406.14) C6.1@4043,3382 ; 4025.93,3389.07 ccw(c4043,3406.14) C6.1@4043,3382 ; 4025.93,3389.07 ccw(c4043,3406.14) C6.1@4043,3382 ; 4025.93,3389.07 ccw(c4043,3406.14) C6.1@4043,3382 ; 4025.93,3389.07 ccw(c4043,3406.14) C6.1@4043,3382 ; 4025.93,3389.07 ccw(c4043,3406.14) C6.1@4043,3382 ; 4025.93,3389.07 ccw(c4043,3406.14) C6.1@4043,3382 ; 4025.93,3389.07 ccw(c4043,3406.14) C6.1@4043,3382 ; 4025.93,3389.07 ccw(c4043,3406.14) C6.1@4043,3382 ; 4025.93,3389.07 ccw(c4043,3406.14) C6.1@4043,3382 ; 4025.93,3389.07 ccw(c4043,3406.14) C6.1@4043,3382 ; C6.1@4036.46,3378.54 cw(c4027.93,3370) C6.1@4040,3370 ; C6.1@4036.46,3378.54 ccw(c4045,3387.07) C6.1@4045,3375 ; C6.1@4036.46,3378.54 cw(c4027.93,3370) C6.1@4040,3370 ; C6.1@4036.46,3378.54 ccw(c4045,3387.07) C6.1@4045,3375 ; C6.1@4036.46,3378.54 cw(c4027.93,3370) C6.1@4040,3370 ; C6.1@4036.46,3378.54 ccw(c4045,3387.07) C6.1@4045,3375 ; C6.1@4036.46,3378.54 cw(c4027.93,3370) C6.1@4040,3370 ; C6.1@4036.46,3378.54 ccw(c4045,3387.07) C6.1@4045,3375 ; C6.1@4036.46,3378.54 ccw(c4045,3387.07) C6.1@4045,3375 ; C6.1@4036.46,3378.54 cw(c4027.93,3370) C6.1@4040,3370 ; C6.1@4036.46,3378.54 ccw(c4045,3387.07) C6.1@4045,3375 ; C6.1@4036.46,3378.54 cw(c4027.93,3370) C6.1@4040,3370 ; C6.1@4036.46,3378.54 ccw(c4045,3387.07) C6.1@4045,3375 ; C6.1@4036.46,3378.54 cw(c4027.93,3370) C6.1@4040,3370 ; C6.1@4036.46,3378.54 ccw(c4045,3387.07) C6.1@4045,3375 ; C6.1@4036.46,3378.54 cw(c4027.93,3370) C6.1@4040,3370 ; C6.1@4036.46,3378.54 ccw(c4045,3387.07) C6.1@4045,3375 ; C6.1@4036.46,3378.54 cw(c4027.93,3370) C6.1@4040,3370 ; C6.1@4036.46,3378.54 ccw(c4045,3387.07) C6.1@4045,3375 ; C6.1@4036.46,3378.54 cw(c4027.93,3370) C6.1@4040,3370 ; C6.1@4036.46,3378.54 ccw(c4045,3387.07) C6.1@4045,3375 ; C6.1@4036.46,3378.54 cw(c4027.93,3370) C6.1@4040,3370 ; C6.1@4036.46,3378.54 ccw(c4045,3387.07) C6.1@4045,3375 ; C6.1@4036.46,3378.54 cw(c4027.93,3370) C6.1@4040,3370 ; C6.1@4036.46,3378.54 ccw(c4045,3387.07) C6.1@4045,3375 ; C6.1@4036.46,3378.54 cw(c4027.93,3370) C6.1@4040,3370 ; C6.1@4036.46,3378.54 ccw(c4045,3387.07) C6.1@4045,3375 ; C6.1@4036.46,3378.54 cw(c4027.93,3370) C6.1@4040,3370 ; C6.1@4036.46,3378.54 ccw(c4045,3387.07) C6.1@4045,3375 ; C6.1@4036.46,3378.54 cw(c4027.93,3370) C6.1@4040,3370 ; C6.1@4036.46,3378.54 ccw(c4045,3387.07) C6.1@4045,3375 ; C6.1@4036.46,3378.54 cw(c4027.93,3370) C6.1@4040,3370 ; C6.1@4036.46,3378.54 ccw(c4045,3387.07) C6.1@4045,3375 ; C6.1@4036.46,3378.54 cw(c4027.93,3370) C6.1@4040,3370 ; C6.1@4036.46,3378.54 ccw(c4045,3387.07) C6.1@4045,3375 ; C6.1@4036.46,3378.54 cw(c4027.93,3370) C6.1@4040,3370 ; C6.1@4036.46,3378.54 ccw(c4045,3387.07) C6.1@4045,3375 ; C6.1@4036.46,3378.54 cw(c4027.93,3370) C6.1@4040,3370 ; C6.1@4036.46,3378.54 ccw(c4045,3387.07) C6.1@4045,3375 ; C6.1@4036.46,3378.54 cw(c4027.93,3370) C6.1@4040,3370 ; C6.1@4036.46,3378.54 ccw(c4045,3387.07) C6.1@4045,3375 ; C6.1@4036.46,3378.54 cw(c4027.93,3370) C6.1@4040,3370 ; C6.1@4036.46,3378.54 ccw(c4045,3387.07) C6.1@4045,3375 ; C6.1@4036.46,3378.54 cw(c4027.93,3370) C6.1@4040,3370 ; C6.1@4036.46,3378.54 ccw(c4045,3387.07) C6.1@4045,3375 ; C6.1@4036.46,3378.54 cw(c4027.93,3370) C6.1@4040,3370 ; C6.1@4036.46,3378.54 ccw(c4045,3387.07) C6.1@4045,3375 ; C6.1@4036.46,3378.54 cw(c4027.93,3370) C6.1@4040,3370 ; C6.1@4036.46,3378.54 ccw(c4045,3387.07) C6.1@4045,3375 ; C6.1@4036.46,3378.54 cw(c4027.93,3370) C6.1@4040,3370 ; C6.1@4036.46,3378.54 ccw(c4045,3387.07) C6.1@4045,3375 ; C6.1@4036.46,3378.54 cw(c4027.93,3370) C6.1@4040,3370 ; C6.1@4036.46,3378.54 ccw(c4045,3387.07) C6.1@4045,3375 ; C6.1@4036.46,3378.54 cw(c4027.93,3370) C6.1@4040,3370 ; C6.1@4036.46,3378.54 ccw(c4045,3387.07) C6.1@4045,3375 ; C6.1@4036.46,3378.54 cw(c4027.93,3370) C6.1@4040,3370 ; C6.1@4036.46,3378.54 ccw(c4045,3387.07) C6.1@4045,3375 ; C6.1@4036.46,3378.54 cw(c4027.93,3370) C6.1@4040,3370 ; C6.1@4036.46,3378.54 ccw(c4045,3387.07) C6.1@4045,3375 ; C6.1@4036.46,3378.54 cw(c4027.93,3370) C6.1@4040,3370 ; C6.1@4036.46,3378.54 ccw(c4045,3387.07) C6.1@4045,3375 ; C6.1@4036.46,3378.54 cw(c4027.93,3370) C6.1@4040,3370 ; C6.1@4036.46,3378.54 ccw(c4045,3387.07) C6.1@4045,3375 ; C6.1@4036.46,3378.54 cw(c4027.93,3370) C6.1@4040,3370 ; C6.1@4036.46,3378.54 ccw(c4045,3387.07) C6.1@4045,3375 ; C6.1@4036.46,3378.54 cw(c4027.93,3370) C6.1@4040,3370 ; C6.1@4036.46,3378.54 ccw(c4045,3387.07) C6.1@4045,3375 ; C6.1@4036.46,3378.54 cw(c4027.93,3370) C6.1@4040,3370 ; C6.1@4036.46,3378.54 ccw(c4045,3387.07) C6.1@4045,3375 ; C6.1@4036.46,3378.54 cw(c4027.93,3370) C6.1@4040,3370 ; C6.1@4036.46,3378.54 ccw(c4045,3387.07) C6.1@4045,3375 ; C6.1@4036.46,3378.54 cw(c4027.93,3370) C6.1@4040,3370 ; 4075,3890 4100,3890 v1(4180,3970) ; C3.1@4099,3847 cw(c4099,3816.73) 4120.4,3838.13 ; C3.1@4099,3847 cw(c4099,3813.2) 4122.9,3837.1 ; C3.1@4099,3847 cw(c4099,3813.2) 4122.9,3837.1 ; C3.1@4099,3847 cw(c4099,3813.2) 4122.9,3837.1 ; C3.1@4099,3847 cw(c4099,3816.73) 4120.4,3838.13 ; C3.1@4099,3847 cw(c4099,3816.73) 4120.4,3838.13 ; C3.1@4099,3847 cw(c4099,3816.73) 4120.4,3838.13 ; C3.1@4099.96,3858.29 ccw(c4122.44,3865.02) 4116.37,3842.35 ; C3.1@4099.96,3858.29 ccw(c4122.44,3865.02) 4116.37,3842.35 ; C3.1@4099.96,3858.29 ccw(c4122.44,3865.02) 4116.37,3842.35 ; C3.1@4099.96,3858.29 ccw(c4122.44,3865.02) 4116.37,3842.35 ; C3.1@4099.96,3858.29 ccw(c4122.44,3865.02) 4116.37,3842.35 ; C3.1@4099.96,3858.29 ccw(c4122.44,3865.02) 4116.37,3842.35 ; C3.1@4099.96,3858.29 ccw(c4122.44,3865.02) 4116.37,3842.35 ; C3.1@4099.96,3858.29 ccw(c4122.44,3865.02) 4116.37,3842.35 ; C3.1@4099.96,3858.29 ccw(c4122.44,3865.02) 4116.37,3842.35 ; C3.1@4099.96,3858.29 ccw(c4122.44,3865.02) 4116.37,3842.35 ; C3.1@4099.96,3858.29 ccw(c4122.44,3865.02) 4116.37,3842.35 ; C3.1@4099.96,3858.29 ccw(c4122.44,3865.02) 4116.37,3842.35 ; C3.1@4099.96,3858.29 ccw(c4122.44,3865.02) 4116.37,3842.35 ; C3.1@4099.96,3858.29 ccw(c4122.44,3865.02) 4116.37,3842.35 ; C3.1@4099.96,3858.29 ccw(c4122.44,3865.02) 4116.37,3842.35 ; C3.1@4100,3855 cw(c4100,3842.93) C3.1@4108.54,3851.46 ; C3.1@4100,3855 cw(c4100,3842.93) C3.1@4108.54,3851.46 ; C3.1@4100,3855 cw(c4100,3842.93) C3.1@4108.54,3851.46 ; C3.1@4102.12,3864.53 cw(c4095.09,3849.48) C3.1@4111.13,3853.78 ; C3.1@4102.12,3864.53 cw(c4095.09,3849.48) C3.1@4111.13,3853.78 ; C3.1@4102.12,3864.53 cw(c4095.09,3849.48) C3.1@4111.13,3853.78 ; C3.1@4102.12,3864.53 cw(c4095.09,3849.48) C3.1@4111.13,3853.78 ; C3.1@4102.12,3864.53 cw(c4095.09,3849.48) C3.1@4111.13,3853.78 ; C3.1@4102.12,3864.53 cw(c4095.09,3849.48) C3.1@4111.13,3853.78 ; C3.1@4102.12,3864.53 cw(c4095.09,3849.48) C3.1@4111.13,3853.78 ; C3.1@4102.12,3864.53 cw(c4095.09,3849.48) C3.1@4111.13,3853.78 ; C3.1@4102.12,3864.53 cw(c4095.09,3849.48) C3.1@4111.13,3853.78 ; C3.1@4102.12,3864.53 cw(c4095.09,3849.48) C3.1@4111.13,3853.78 ; C3.1@4102.12,3864.53 cw(c4095.09,3849.48) C3.1@4111.13,3853.78 ; C3.1@4102.12,3864.53 cw(c4095.09,3849.48) C3.1@4111.13,3853.78 ; C3.1@4102.12,3864.53 cw(c4095.09,3849.48) C3.1@4111.13,3853.78 ; C3.1@4102.12,3864.53 cw(c4095.09,3849.48) C3.1@4111.13,3853.78 ; C3.1@4102.12,3864.53 cw(c4095.09,3849.48) C3.1@4111.13,3853.78 ; C3.1@4102.12,3864.53 cw(c4095.09,3849.48) C3.1@4111.13,3853.78 ; C3.1@4102.12,3864.53 cw(c4095.09,3849.48) C3.1@4111.13,3853.78 ; C3.1@4102.12,3864.53 cw(c4095.09,3849.48) C3.1@4111.13,3853.78 ; C3.1@4102.31,3864.43 cw(c4094.08,3848.66) C3.1@4111.27,3853.26 ; C3.1@4102.31,3864.43 cw(c4094.08,3848.66) C3.1@4111.27,3853.26 ; C3.1@4102.31,3864.43 cw(c4094.08,3848.66) C3.1@4111.27,3853.26 ; C3.1@4102.31,3864.43 cw(c4094.08,3848.66) C3.1@4111.27,3853.26 ; C3.1@4102.31,3864.43 cw(c4094.08,3848.66) C3.1@4111.27,3853.26 ; C3.1@4102.31,3864.43 cw(c4094.08,3848.66) C3.1@4111.27,3853.26 ; C3.1@4102.31,3864.43 cw(c4094.08,3848.66) C3.1@4111.27,3853.26 ; C3.1@4102.31,3864.43 cw(c4094.08,3848.66) C3.1@4111.27,3853.26 ; C3.1@4102.31,3864.43 cw(c4094.08,3848.66) C3.1@4111.27,3853.26 ; C3.1@4102.31,3864.43 cw(c4094.08,3848.66) C3.1@4111.27,3853.26 ; C3.1@4104.78,3858.54 ccw(c4116.69,3854.89) C3.1@4106.09,3848.35 ; C3.1@4104.78,3858.54 ccw(c4116.69,3854.89) C3.1@4106.09,3848.35 ; C3.1@4104.78,3858.54 ccw(c4116.69,3854.89) C3.1@4106.09,3848.35 ; C3.1@4104.78,3858.54 ccw(c4116.69,3854.89) C3.1@4106.09,3848.35 ; C3.1@4104.78,3858.54 ccw(c4116.69,3854.89) C3.1@4106.09,3848.35 ; C3.1@4104.78,3858.54 ccw(c4116.69,3854.89) C3.1@4106.09,3848.35 ; C3.1@4104.78,3858.54 ccw(c4116.69,3854.89) C3.1@4106.09,3848.35 ; C3.1@4104.78,3858.54 ccw(c4116.69,3854.89) C3.1@4106.09,3848.35 ; C3.1@4104.78,3858.54 ccw(c4116.69,3854.89) C3.1@4106.09,3848.35 ; C3.1@4104.78,3858.54 ccw(c4116.69,3854.89) C3.1@4106.09,3848.35 ; C3.1@4104.78,3858.54 ccw(c4116.69,3854.89) C3.1@4106.09,3848.35 ; C3.1@4104.78,3858.54 ccw(c4116.69,3854.89) C3.1@4106.09,3848.35 ; C3.1@4104.78,3858.54 ccw(c4116.69,3854.89) C3.1@4106.09,3848.35 ; C3.1@4104.78,3858.54 ccw(c4116.69,3854.89) C3.1@4106.09,3848.35 ; C3.1@4104.78,3858.54 ccw(c4116.69,3854.89) C3.1@4106.09,3848.35 ; C3.1@4104.78,3858.54 ccw(c4116.69,3854.89) C3.1@4106.09,3848.35 ; C3.1@4104.78,3858.54 ccw(c4116.69,3854.89) C3.1@4106.09,3848.35 ; C3.1@4104.78,3858.54 ccw(c4116.69,3854.89) C3.1@4106.09,3848.35 ; C3.1@4104.78,3858.54 ccw(c4116.69,3854.89) C3.1@4106.09,3848.35 ; C3.1@4104.78,3858.54 ccw(c4116.69,3854.89) C3.1@4106.09,3848.35 ; C3.1@4104.78,3858.54 ccw(c4116.69,3854.89) C3.1@4106.09,3848.35 ; C3.1@4104.78,3858.54 ccw(c4116.69,3854.89) C3.1@4106.09,3848.35 ; C3.1@4104.78,3858.54 ccw(c4116.69,3854.89) C3.1@4106.09,3848.35 ; C3.1@4104.78,3858.54 ccw(c4116.69,3854.89) C3.1@4106.09,3848.35 ; C3.1@4104.78,3858.54 ccw(c4116.69,3854.89) C3.1@4106.09,3848.35 ; C3.1@4104.78,3858.54 ccw(c4116.69,3854.89) C3.1@4106.09,3848.35 ; C3.1@4104.78,3858.54 ccw(c4116.69,3854.89) C3.1@4106.09,3848.35 ; C3.1@4104.78,3858.54 ccw(c4116.69,3854.89) C3.1@4106.09,3848.35 ; C3.1@4104.78,3858.54 ccw(c4116.69,3854.89) C3.1@4106.09,3848.35 ; C3.1@4104.78,3858.54 ccw(c4116.69,3854.89) C3.1@4106.09,3848.35 ; C3.1@4104.78,3858.54 ccw(c4116.69,3854.89) C3.1@4106.09,3848.35 ; C3.1@4104.78,3858.54 ccw(c4116.69,3854.89) C3.1@4106.09,3848.35 ; C3.1@4104.78,3858.54 ccw(c4116.69,3854.89) C3.1@4106.09,3848.35 ; C3.1@4104.78,3858.54 ccw(c4116.69,3854.89) C3.1@4106.09,3848.35 ; C3.1@4104.78,3858.54 ccw(c4116.69,3854.89) C3.1@4106.09,3848.35 ; C3.1@4104.78,3858.54 ccw(c4116.69,3854.89) C3.1@4106.09,3848.35 ; C3.1@4104.78,3858.54 ccw(c4116.69,3854.89) C3.1@4106.09,3848.35 ; C3.1@4104.78,3858.54 ccw(c4116.69,3854.89) C3.1@4106.09,3848.35 ; C3.1@4104.78,3858.54 ccw(c4116.69,3854.89) C3.1@4106.09,3848.35 ; C3.1@4104.78,3858.54 ccw(c4116.69,3854.89) C3.1@4106.09,3848.35 ; C3.1@4104.78,3858.54 ccw(c4116.69,3854.89) C3.1@4106.09,3848.35 ; C3.1@4104.78,3858.54 ccw(c4116.69,3854.89) C3.1@4106.09,3848.35 ; C3.1@4104.78,3858.54 ccw(c4116.69,3854.89) C3.1@4106.09,3848.35 ; C3.1@4104.78,3858.54 ccw(c4116.69,3854.89) C3.1@4106.09,3848.35 ; C3.1@4104.78,3858.54 ccw(c4116.69,3854.89) C3.1@4106.09,3848.35 ; C3.1@4104.78,3858.54 ccw(c4116.69,3854.89) C3.1@4106.09,3848.35 ; C3.1@4105,3860 ccw(c4120.6,3860) C3.1@4109.57,3848.97 ; C3.1@4105,3860 ccw(c4117.07,3860) C3.1@4108.54,3851.46 ; C3.1@4105,3860 ccw(c4117.07,3860) C3.1@4108.54,3851.46 ; C3.1@4105,3860 ccw(c4117.07,3860) C3.1@4108.54,3851.46 ; C3.1@4105,3860 ccw(c4120.6,3860) C3.1@4109.57,3848.97 ; C3.1@4105,3860 ccw(c4120.6,3860) C3.1@4109.57,3848.97 ; C3.1@4105,3860 ccw(c4120.6,3860) C3.1@4109.57,3848.97 ; C3.1@4110,3858 ccw(c4132.84,3858) 4116.69,3841.85 ; C3.1@4110,3858 ccw(c4129.31,3858) 4115.66,3844.34 ; C3.1@4110,3858 ccw(c4129.31,3858) 4115.66,3844.34 ; C3.1@4110,3858 ccw(c4129.31,3858) 4115.66,3844.34 ; C3.1@4110,3858 ccw(c4132.84,3858) 4116.69,3841.85 ; C3.1@4110,3858 ccw(c4132.84,3858) 4116.69,3841.85 ; C3.1@4110,3858 ccw(c4132.84,3858) 4116.69,3841.85 ; 4148.79,3938.79 v1(4180,3970) ; 4148.79,3938.79 v1(4180,3970) ; 4148.79,3938.79 v1(4180,3970) ; 4158.1,3948.1 cw(c4182,3924.2) C2.1@4182,3958 ; 4158.1,3948.1 cw(c4182,3924.2) C2.1@4182,3958 ; 4158.1,3948.1 cw(c4182,3924.2) C2.1@4182,3958 ; 4158.1,3948.1 cw(c4182,3924.2) C2.1@4182,3958 ; 4158.1,3948.1 cw(c4182,3924.2) C2.1@4182,3958 ; 4158.1,3948.1 cw(c4182,3924.2) C2.1@4182,3958 ; 4158.1,3948.1 cw(c4182,3924.2) C2.1@4182,3958 ; 4158.1,3948.1 cw(c4182,3924.2) C2.1@4182,3958 ; 4158.1,3948.1 cw(c4182,3924.2) C2.1@4182,3958 ; 4158.1,3948.1 cw(c4182,3924.2) C2.1@4182,3958 ; 4158.1,3948.1 cw(c4182,3924.2) C2.1@4182,3958 ; 4158.1,3948.1 cw(c4182,3924.2) C2.1@4182,3958 ; 4158.1,3948.1 cw(c4182,3924.2) C2.1@4182,3958 ; 4158.1,3948.1 cw(c4182,3924.2) C2.1@4182,3958 ; 4158.1,3948.1 cw(c4182,3924.2) C2.1@4182,3958 ; 4158.1,3948.1 cw(c4182,3924.2) C2.1@4182,3958 ; 4158.1,3948.1 cw(c4182,3924.2) C2.1@4182,3958 ; 4158.1,3948.1 cw(c4182,3924.2) C2.1@4182,3958 ; 4158.1,3948.1 cw(c4182,3924.2) C2.1@4182,3958 ; 4158.1,3948.1 cw(c4182,3924.2) C2.1@4182,3958 ; 4158.1,3948.1 cw(c4182,3924.2) C2.1@4182,3958 ; 4158.1,3948.1 cw(c4182,3924.2) C2.1@4182,3958 ; 4158.1,3948.1 cw(c4182,3924.2) C2.1@4182,3958 ; 4158.1,3948.1 cw(c4182,3924.2) C2.1@4182,3958 ; 4158.1,3948.1 cw(c4182,3924.2) C2.1@4182,3958 ; 4158.1,3948.1 cw(c4182,3924.2) C2.1@4182,3958 ; 4158.1,3948.1 cw(c4182,3924.2) C2.1@4182,3958 ; 4158.1,3948.1 cw(c4182,3924.2) C2.1@4182,3958 ; 4158.1,3948.1 cw(c4182,3924.2) C2.1@4182,3958 ; 4158.1,3948.1 cw(c4182,3924.2) C2.1@4182,3958 ; 4158.1,3948.1 cw(c4182,3924.2) C2.1@4182,3958 ; 4158.1,3948.1 cw(c4182,3924.2) C2.1@4182,3958 ; 4164.63,3953.35 ccw(c4158.56,3976.02) C2.1@4181.04,3969.29 ; 4164.63,3953.35 ccw(c4158.56,3976.02) C2.1@4181.04,3969.29 ; 4164.63,3953.35 ccw(c4158.56,3976.02) C2.1@4181.04,3969.29 ; 4164.63,3953.35 ccw(c4158.56,3976.02) C2.1@4181.04,3969.29 ; 4164.63,3953.35 ccw(c4158.56,3976.02) C2.1@4181.04,3969.29 ; 4164.63,3953.35 ccw(c4158.56,3976.02) C2.1@4181.04,3969.29 ; 4164.63,3953.35 ccw(c4158.56,3976.02) C2.1@4181.04,3969.29 ; 4164.63,3953.35 ccw(c4158.56,3976.02) C2.1@4181.04,3969.29 ; 4164.63,3953.35 ccw(c4158.56,3976.02) C2.1@4181.04,3969.29 ; 4164.63,3953.35 ccw(c4158.56,3976.02) C2.1@4181.04,3969.29 ; 4164.63,3953.35 ccw(c4158.56,3976.02) C2.1@4181.04,3969.29 ; 4164.63,3953.35 ccw(c4158.56,3976.02) C2.1@4181.04,3969.29 ; 4164.63,3953.35 ccw(c4158.56,3976.02) C2.1@4181.04,3969.29 ; 4164.63,3953.35 ccw(c4158.56,3976.02) C2.1@4181.04,3969.29 ; 4164.63,3953.35 ccw(c4158.56,3976.02) C2.1@4181.04,3969.29 ; 4164.63,3953.35 ccw(c4158.56,3976.02) C2.1@4181.04,3969.29 ; 4164.63,3953.35 ccw(c4158.56,3976.02) C2.1@4181.04,3969.29 ; 4164.63,3953.35 ccw(c4158.56,3976.02) C2.1@4181.04,3969.29 ; 4164.63,3953.35 ccw(c4158.56,3976.02) C2.1@4181.04,3969.29 ; 4164.63,3953.35 ccw(c4158.56,3976.02) C2.1@4181.04,3969.29 ; 4164.63,3953.35 ccw(c4158.56,3976.02) C2.1@4181.04,3969.29 ; 4164.63,3953.35 ccw(c4158.56,3976.02) C2.1@4181.04,3969.29 ; 4164.63,3953.35 ccw(c4158.56,3976.02) C2.1@4181.04,3969.29 ; 4164.63,3953.35 ccw(c4158.56,3976.02) C2.1@4181.04,3969.29 ; 4164.63,3953.35 ccw(c4158.56,3976.02) C2.1@4181.04,3969.29 ; 4164.63,3953.35 ccw(c4158.56,3976.02) C2.1@4181.04,3969.29 ; 4164.63,3953.35 ccw(c4158.56,3976.02) C2.1@4181.04,3969.29 ; 4164.63,3953.35 ccw(c4158.56,3976.02) C2.1@4181.04,3969.29 ; 4164.63,3953.35 ccw(c4158.56,3976.02) C2.1@4181.04,3969.29 ; 4164.63,3953.35 ccw(c4158.56,3976.02) C2.1@4181.04,3969.29 ; 4164.63,3953.35 ccw(c4158.56,3976.02) C2.1@4181.04,3969.29 ; 4164.63,3953.35 ccw(c4158.56,3976.02) C2.1@4181.04,3969.29 ; 4164.63,3953.35 ccw(c4158.56,3976.02) C2.1@4181.04,3969.29 ; 4164.63,3953.35 ccw(c4158.56,3976.02) C2.1@4181.04,3969.29 ; 4164.63,3953.35 ccw(c4158.56,3976.02) C2.1@4181.04,3969.29 ; 4164.63,3953.35 ccw(c4158.56,3976.02) C2.1@4181.04,3969.29 ; 4164.63,3953.35 ccw(c4158.56,3976.02) C2.1@4181.04,3969.29 ; 4164.63,3953.35 ccw(c4158.56,3976.02) C2.1@4181.04,3969.29 ; 4164.63,3953.35 ccw(c4158.56,3976.02) C2.1@4181.04,3969.29 ; 4164.63,3953.35 ccw(c4158.56,3976.02) C2.1@4181.04,3969.29 ; 4164.63,3953.35 ccw(c4158.56,3976.02) C2.1@4181.04,3969.29 ; 4164.63,3953.35 ccw(c4158.56,3976.02) C2.1@4181.04,3969.29 ; 4164.63,3953.35 ccw(c4158.56,3976.02) C2.1@4181.04,3969.29 ; 4164.63,3953.35 ccw(c4158.56,3976.02) C2.1@4181.04,3969.29 ; 4164.63,3953.35 ccw(c4158.56,3976.02) C2.1@4181.04,3969.29 ; 4164.63,3953.35 ccw(c4158.56,3976.02) C2.1@4181.04,3969.29 ; 4164.63,3953.35 ccw(c4158.56,3976.02) C2.1@4181.04,3969.29 ; 4164.63,3953.35 ccw(c4158.56,3976.02) C2.1@4181.04,3969.29 ; 4164.63,3953.35 ccw(c4158.56,3976.02) C2.1@4181.04,3969.29 ; 4164.63,3953.35 ccw(c4158.56,3976.02) C2.1@4181.04,3969.29 ; 4164.63,3953.35 ccw(c4158.56,3976.02) C2.1@4181.04,3969.29 ; 4164.63,3953.35 ccw(c4158.56,3976.02) C2.1@4181.04,3969.29 ; 4164.63,3953.35 ccw(c4158.56,3976.02) C2.1@4181.04,3969.29 ; 4164.63,3953.35 ccw(c4158.56,3976.02) C2.1@4181.04,3969.29 ; 4164.63,3953.35 ccw(c4158.56,3976.02) C2.1@4181.04,3969.29 ; 4164.63,3953.35 ccw(c4158.56,3976.02) C2.1@4181.04,3969.29 ; 4164.63,3953.35 ccw(c4158.56,3976.02) C2.1@4181.04,3969.29 ; 4164.63,3953.35 ccw(c4158.56,3976.02) C2.1@4181.04,3969.29 ; 4164.63,3953.35 ccw(c4158.56,3976.02) C2.1@4181.04,3969.29 ; 4164.63,3953.35 ccw(c4158.56,3976.02) C2.1@4181.04,3969.29 ; 4164.63,3953.35 ccw(c4158.56,3976.02) C2.1@4181.04,3969.29 ; 4164.63,3953.35 ccw(c4158.56,3976.02) C2.1@4181.04,3969.29 ; 4164.63,3953.35 ccw(c4158.56,3976.02) C2.1@4181.04,3969.29 ; 4164.63,3953.35 ccw(c4158.56,3976.02) C2.1@4181.04,3969.29 ; 4164.63,3953.35 ccw(c4158.56,3976.02) C2.1@4181.04,3969.29 ; 4164.63,3953.35 ccw(c4158.56,3976.02) C2.1@4181.04,3969.29 ; 4164.63,3953.35 ccw(c4158.56,3976.02) C2.1@4181.04,3969.29 ; 4164.63,3953.35 ccw(c4158.56,3976.02) C2.1@4181.04,3969.29 ; 4164.63,3953.35 ccw(c4158.56,3976.02) C2.1@4181.04,3969.29 ; 4164.63,3953.35 ccw(c4158.56,3976.02) C2.1@4181.04,3969.29 ; 4164.63,3953.35 ccw(c4158.56,3976.02) C2.1@4181.04,3969.29 ; 4164.63,3953.35 ccw(c4158.56,3976.02) C2.1@4181.04,3969.29 ; 4164.63,3953.35 ccw(c4158.56,3976.02) C2.1@4181.04,3969.29 ; 4164.63,3953.35 ccw(c4158.56,3976.02) C2.1@4181.04,3969.29 ; 4164.63,3953.35 ccw(c4158.56,3976.02) C2.1@4181.04,3969.29 ; 4164.63,3953.35 ccw(c4158.56,3976.02) C2.1@4181.04,3969.29 ; 4164.63,3953.35 ccw(c4158.56,3976.02) C2.1@4181.04,3969.29 ; 4164.63,3953.35 ccw(c4158.56,3976.02) C2.1@4181.04,3969.29 ; 4164.63,3953.35 ccw(c4158.56,3976.02) C2.1@4181.04,3969.29 ; 4164.63,3953.35 ccw(c4158.56,3976.02) C2.1@4181.04,3969.29 ; 4164.63,3953.35 ccw(c4158.56,3976.02) C2.1@4181.04,3969.29 ; 4164.63,3953.35 ccw(c4158.56,3976.02) C2.1@4181.04,3969.29 ; 4164.63,3953.35 ccw(c4158.56,3976.02) C2.1@4181.04,3969.29 ; 4164.63,3953.35 ccw(c4158.56,3976.02) C2.1@4181.04,3969.29 ; 4164.63,3953.35 ccw(c4158.56,3976.02) C2.1@4181.04,3969.29 ; 4164.63,3953.35 ccw(c4158.56,3976.02) C2.1@4181.04,3969.29 ; 4164.63,3953.35 ccw(c4158.56,3976.02) C2.1@4181.04,3969.29 ; 4164.63,3953.35 ccw(c4158.56,3976.02) C2.1@4181.04,3969.29 ; 4164.63,3953.35 ccw(c4158.56,3976.02) C2.1@4181.04,3969.29 ; 4164.63,3953.35 ccw(c4158.56,3976.02) C2.1@4181.04,3969.29 ; 4164.63,3953.35 ccw(c4158.56,3976.02) C2.1@4181.04,3969.29 ; 4164.63,3953.35 ccw(c4158.56,3976.02) C2.1@4181.04,3969.29 ; 4164.63,3953.35 ccw(c4158.56,3976.02) C2.1@4181.04,3969.29 ; 4164.63,3953.35 ccw(c4158.56,3976.02) C2.1@4181.04,3969.29 ; 4164.63,3953.35 ccw(c4158.56,3976.02) C2.1@4181.04,3969.29 ; 4164.63,3953.35 ccw(c4158.56,3976.02) C2.1@4181.04,3969.29 ; 4164.63,3953.35 ccw(c4158.56,3976.02) C2.1@4181.04,3969.29 ; 4164.63,3953.35 ccw(c4158.56,3976.02) C2.1@4181.04,3969.29 ; 4164.63,3953.35 ccw(c4158.56,3976.02) C2.1@4181.04,3969.29 ; 4164.63,3953.35 ccw(c4158.56,3976.02) C2.1@4181.04,3969.29 ; 4164.63,3953.35 ccw(c4158.56,3976.02) C2.1@4181.04,3969.29 ; 4164.63,3953.35 ccw(c4158.56,3976.02) C2.1@4181.04,3969.29 ; 4164.63,3953.35 ccw(c4158.56,3976.02) C2.1@4181.04,3969.29 ; 4164.63,3953.35 ccw(c4158.56,3976.02) C2.1@4181.04,3969.29 ; 4164.63,3953.35 ccw(c4158.56,3976.02) C2.1@4181.04,3969.29 ; 4164.63,3953.35 ccw(c4158.56,3976.02) C2.1@4181.04,3969.29 ; 4164.63,3953.35 ccw(c4158.56,3976.02) C2.1@4181.04,3969.29 ; 4164.63,3953.35 ccw(c4158.56,3976.02) C2.1@4181.04,3969.29 ; 4164.63,3953.35 ccw(c4158.56,3976.02) C2.1@4181.04,3969.29 ; 4164.63,3953.35 ccw(c4158.56,3976.02) C2.1@4181.04,3969.29 ; 4164.63,3953.35 ccw(c4158.56,3976.02) C2.1@4181.04,3969.29 ; 4164.63,3953.35 ccw(c4158.56,3976.02) C2.1@4181.04,3969.29 ; 4165.34,3955.34 ccw(c4151.69,3969) C2.1@4171,3969 ; 4165.34,3955.34 ccw(c4151.69,3969) C2.1@4171,3969 ; 4165.34,3955.34 ccw(c4151.69,3969) C2.1@4171,3969 ; 4165.34,3955.34 ccw(c4151.69,3969) C2.1@4171,3969 ; 4165.34,3955.34 ccw(c4151.69,3969) C2.1@4171,3969 ; 4165.34,3955.34 ccw(c4151.69,3969) C2.1@4171,3969 ; 4165.34,3955.34 ccw(c4151.69,3969) C2.1@4171,3969 ; 4165.34,3955.34 ccw(c4151.69,3969) C2.1@4171,3969 ; 4165.34,3955.34 ccw(c4151.69,3969) C2.1@4171,3969 ; 4165.34,3955.34 ccw(c4151.69,3969) C2.1@4171,3969 ; 4165.34,3955.34 ccw(c4151.69,3969) C2.1@4171,3969 ; 4165.34,3955.34 ccw(c4151.69,3969) C2.1@4171,3969 ; 4165.34,3955.34 ccw(c4151.69,3969) C2.1@4171,3969 ; 4165.34,3955.34 ccw(c4151.69,3969) C2.1@4171,3969 ; 4165.34,3955.34 ccw(c4151.69,3969) C2.1@4171,3969 ; 4165.34,3955.34 ccw(c4151.69,3969) C2.1@4171,3969 ; 4165.34,3955.34 ccw(c4151.69,3969) C2.1@4171,3969 ; 4165.34,3955.34 ccw(c4151.69,3969) C2.1@4171,3969 ; 4165.34,3955.34 ccw(c4151.69,3969) C2.1@4171,3969 ; 4165.34,3955.34 ccw(c4151.69,3969) C2.1@4171,3969 ; 4165.34,3955.34 ccw(c4151.69,3969) C2.1@4171,3969 ; 4165.34,3955.34 ccw(c4151.69,3969) C2.1@4171,3969 ; 4165.34,3955.34 ccw(c4151.69,3969) C2.1@4171,3969 ; 4165.34,3955.34 ccw(c4151.69,3969) C2.1@4171,3969 ; 4165.34,3955.34 ccw(c4151.69,3969) C2.1@4171,3969 ; 4165.34,3955.34 ccw(c4151.69,3969) C2.1@4171,3969 ; 4165.34,3955.34 ccw(c4151.69,3969) C2.1@4171,3969 ; 4165.34,3955.34 ccw(c4151.69,3969) C2.1@4171,3969 ; 4165.34,3955.34 ccw(c4151.69,3969) C2.1@4171,3969 ; 4165.34,3955.34 ccw(c4151.69,3969) C2.1@4171,3969 ; 4165.34,3955.34 ccw(c4151.69,3969) C2.1@4171,3969